# Altium PCB PCB1.PcbDoc
Units mm, origin at the board's own origin, x right, y up, seen from the top; angles counter-clockwise.
Board outline 44 x 20 mm, 2 copper layers (Top Layer, Bottom Layer), stack 1.57 mm thick; 8 components, 3 nets, 17 pads, 4 vias.
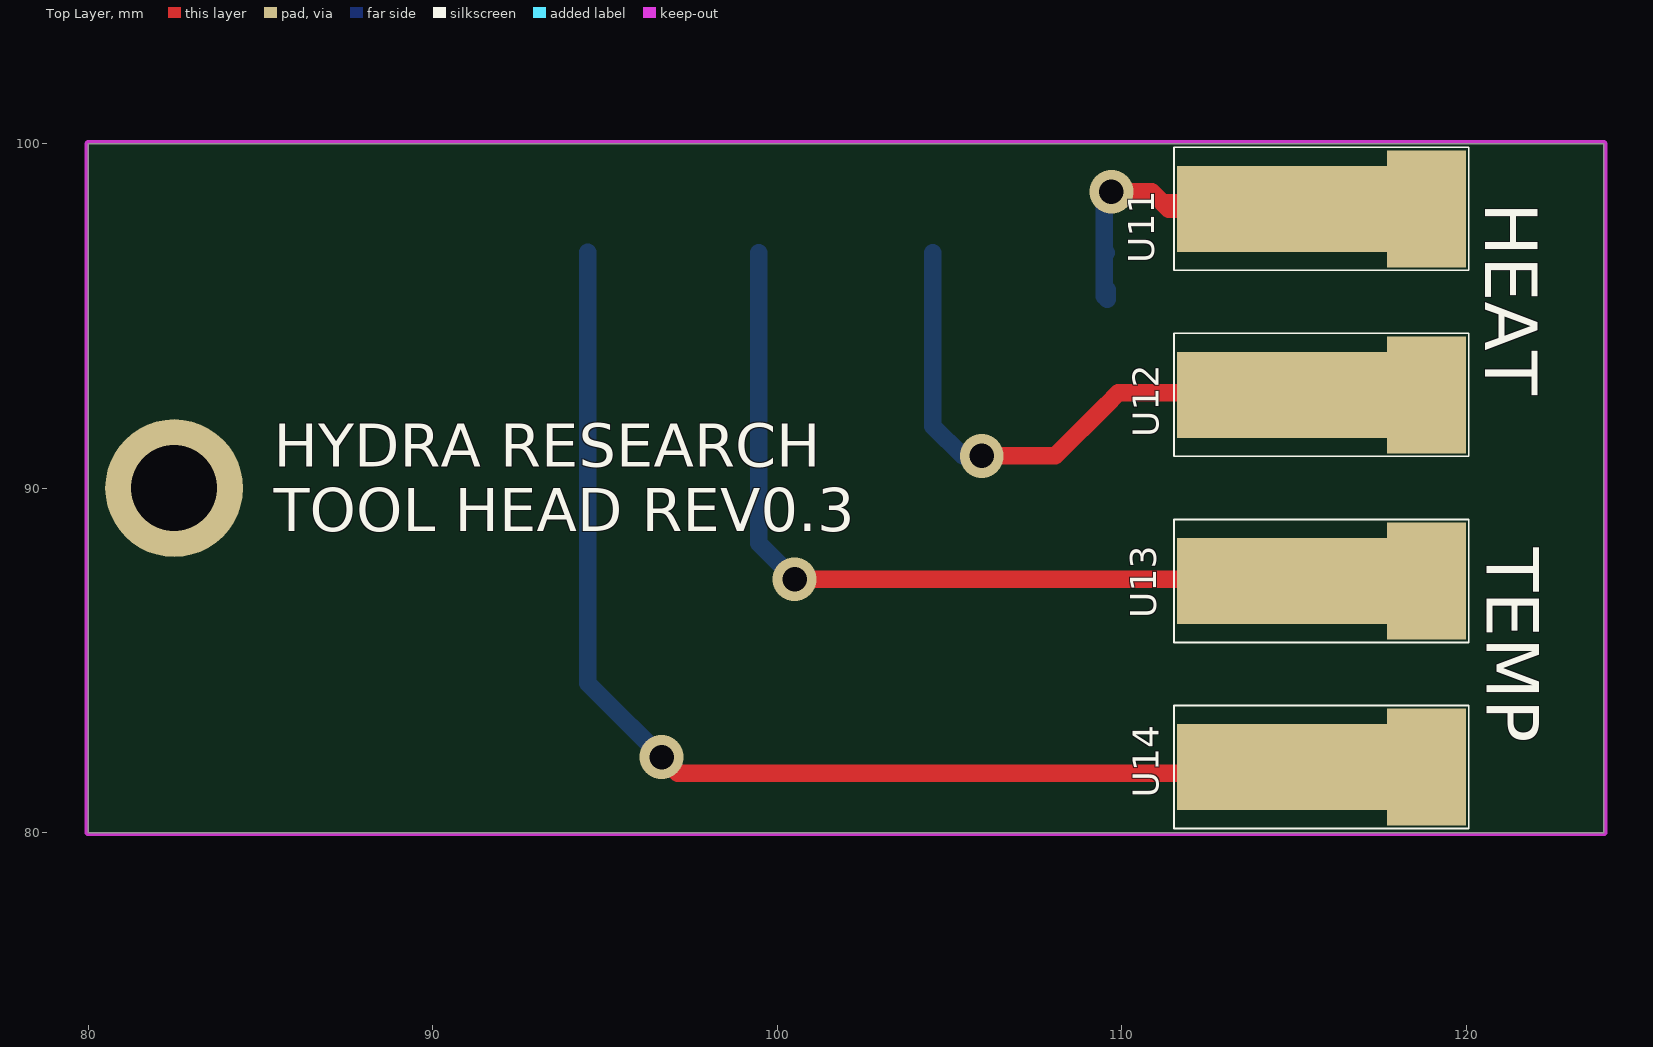
[diagram p0: Top Layer view]
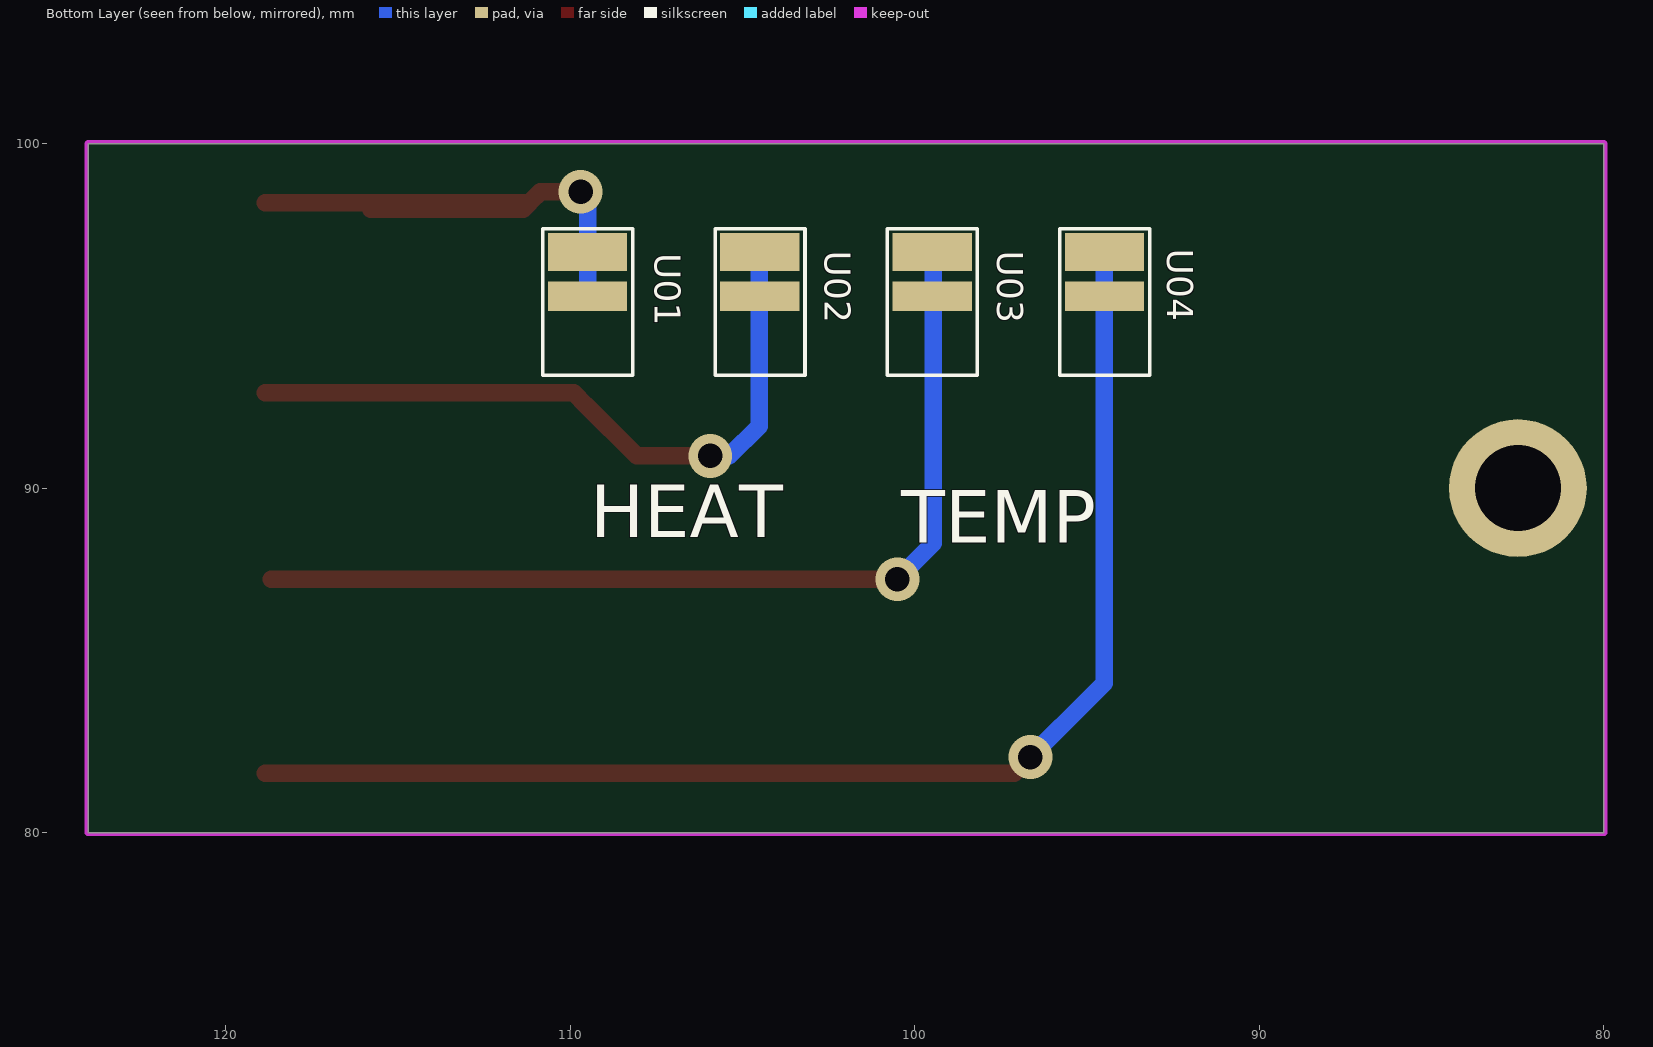
[diagram p1: Bottom Layer view, seen from below]

## Layer stack, top to bottom
Top Solder: solder mask 0.01, Solder Resist, Dk 3.5
Top Layer: signal copper 0.035
Dielectric 1: dielectric 1.5, FR-4, Dk 4.8
Bottom Layer: signal copper 0.035
Bottom Solder: solder mask 0.01, Solder Resist, Dk 3.5

## Board outline
80,80 80,100 124,100 124,80

## Design rules (kind name [scope] priority, off if disabled: settings)
Clearance [All] p1: gap=0.254 ignorepadtopadclearanceinfootprint=FALSE except(0: Arc-Hole Track-Hole SMDPad-Hole THPad-Hole Via-Hole Fill-Hole Poly-Hole Region-Hole Text-Hole; 0.01: Arc-Arc Arc-Track Arc-SMDPad Arc-THPad Track-Track Track-SMDPad Track-THPad SMDPad-SMDPad SMDPad-THPad THPad-THPad)
ComponentClearance [All] p1: gap=0.25 collisioncheckmode=3 verticalgap=0 showdistances=FALSE
MinimumSolderMaskSliver [All] p1: minsoldermaskwidth=0.025
PolygonConnect [All] p1: connectstyle=Relief reliefconductorwidth=0.254 reliefentries=4 polygonreliefangle="90 Angle" airgapwidth=0.254
RoomDefinition REV0.4 [InComponentClass('REV0.4')] p1: confinementstyle=ConfineIn formatcopy=TRUE lockcomponents=FALSE outline 73.673,75.184 134.252,75.184 134.252,108.47 73.673,108.47
RoutingVias [All] p1: holewidth=0.711 width=1.27 viastyle="Through Hole" minholewidth=0.711 minwidth=1.27 maxholewidth=0.711 maxwidth=1.27
ShortCircuit [InPadClass('All Pads') vs InPadClass('All Pads')] p1: allowed=TRUE
SolderMaskExpansion [All] p1: expansion=0.102
Width [All] p1: maxlimit=0.762 minlimit=0.254 preferedwidth=0.508
27 further rules are at their usual default settings.

## Components (designator, comment, footprint, x,y, rotation, side; value= is the part's Value field where it differs from the comment)
U01 "A125081CT" A125081CT-ND 110.5,97.27 r180 bottom
U02 "A125081CT" A125081CT-ND 105.5,97.27 r180 bottom
U03 "A125081CT" A125081CT-ND 100.5,97.27 r180 bottom
U04 "A125081CT" A125081CT-ND 95.5,97.27 r180 bottom
U11 "WM17990CT" WM17990CT-ND-L 123.631,95.6 r90 top
U12 "WM17990CT" WM17990CT-ND-L 123.631,90.2 r90 top
U13 "WM17990CT" WM17990CT-ND-L 123.631,84.8 r90 top
U14 "WM17990CT" WM17990CT-ND-L 123.631,79.4 r90 top

## Footprints (in the part's own frame and the unit in brackets; to place one, negate y for a bottom-side part, rotate by r counter-clockwise, add the part's x,y. Pads: shape width x height; smd on the part's side, far side on the other; paste and mask are expansions set on the pad)
A125081CT-ND [mm]
  rect 2.3x0.85 smd: 1(1,-1.7)
  rect 2.3x1.1 smd: 1(1,-0.42)
  silkscreen extent -0.3,-3.99 2.31,0.25, body extent 0.15,-3.96 1.85,0.04, height 2.29
WM17990CT-ND-L [mm]
  rect 3.4x2.3 smd mask+0.1: 1(2.5,4.78)
  rect 2.5x8.4 smd mask+0.1: 1(2.5,7.831)
  Top Layer region: 0.317,9.449
  Top Layer region: -3.81,6.731
  silkscreen extent 0.72,3.56 4.29,12.11, body extent 1,4.05 4,12.05, height 2.9

## Free pads (board coordinates)
  round 4 hole 2.5 paste+0: 2(82.5,90)

## Via types
v1: diameter 1.27, hole 0.711, Top Layer to Bottom Layer, 4 vias

## Nets (pads, with @x,y where several pads share a name; then routed paths per layer and width w, separated by ;. In a path a pad name is that pad's centre, name@x,y a point inside that pad or via, vN(x,y) a via of type N, cw(c..) or ccw(c..) an arc to the next point about the centre after c; other vN are vias at no path point)
NetU01_?: 
NetU03_?: 
NetU04_?: 
pads on no net: U01.1 U02.1 U03.1 U04.1 U11.1 U12.1 U13.1 U14.1
copper on no net: | length 107
  Top Layer w0.254: v1(96.647,82.194) v1@96.698,82.144 ; v1(100.508,87.351) v1@100.584,87.351
  Top Layer w0.508: v1(96.647,82.194) 97.121,81.72 118.851,81.72 ; v1@100.584,87.351 118.676,87.351 ; v1(105.943,90.932) 108.077,90.932 109.576,92.431 ; 109.54,92.395 109.905,92.76 118.851,92.76 ; v1(109.703,98.603) 110.867,98.603 111.19,98.28 118.851,98.28 ; 110.96,98.51 111.37,98.1 115.8,98.1
  Bottom Layer w0.254: 94.485,95.432 94.485,95.519 ; 99.466,95.555 99.466,95.642 99.466,95.85 ; 99.47,96.835 99.47,96.364 99.466,96.361 ; 99.466,95.85 99.47,95.853 99.466,95.85 ; 99.466,96.361 99.466,96.876 99.466,96.361
  Bottom Layer w0.508: 94.5,84.341 94.5,95.57 94.5,96.85 ; 94.52,84.321 94.81,84.031 v1(96.647,82.194) ; 99.466,95.85 99.466,94.749 99.466,88.392 v1(100.508,87.351) ; 99.47,95.853 99.47,96.835 ; 104.521,94.622 104.521,91.796 105.385,90.932 v1(105.943,90.932) ; 104.524,94.625 104.524,96.835 104.524,96.491 ; 109.5,95.57 109.5,98.4 v1(109.703,98.603) v1@109.553,98.454 ; 109.55,95.555 109.55,95.773 109.553,95.777 109.576,95.755 109.576,95.479 ; 109.55,96.832 109.553,96.835

## Keep-outs
Keep-Out Layer:
  lines w0.1: 79.95,80 ccw(c80,80) 80,79.95 ; 79.95,80 ccw(c80,80) 80,79.95 ; 79.95,80 79.95,100 ; 79.95,100 cw(c80,100) 80,100.05 ; 79.95,100 cw(c80,100) 80,100.05 ; 80,79.95 124,79.95 ; 80,100.05 124,100.05 ; 124,79.95 ccw(c124,80) 124.05,80 ; 124,79.95 ccw(c124,80) 124.05,80 ; 124,100.05 cw(c124,100) 124.05,100 ; 124,100.05 cw(c124,100) 124.05,100 ; 124.05,80 124.05,100

## Silkscreen, mask and mechanical layers (free items; w line width, h text height)
Top Overlay:
  text "HEAT" at 120.548,98.298 h1.52 r270
  text "HYDRA RESEARCH / TOOL HEAD REV0.3" at 85.395,88.748 h1.25
  text "TEMP" at 120.599,88.265 h1.52 r270
Bottom Overlay:
  text "HEAT" at 109.42,88.57 h1.52
  text "TEMP" at 100.39,88.41 h1.52
Drill Drawing:
  drawing of 213 lines, arcs and shapes, not listed
  text "Symbol" at 82.047,124.354 h1.83
  text "Count" at 94.896,124.354 h1.83
  text "Hole Size" at 107.085,124.354 h1.83
  text "Plated" at 135.017,124.354 h1.83
  text "Hole Type" at 147.866,124.354 h1.83
  text "Drill Layer Pair" at 166.504,124.354 h1.83
  text "Via/Pad" at 204.593,124.354 h1.83
  text "Pad Shape" at 219.575,124.354 h1.83
  text "Template" at 238.518,124.354 h1.83
  text "Description" at 259.087,124.354 h1.83
  text "Hole Tolerance (+)" at 280.772,124.354 h1.83
  text "Hole Tolerance (-)" at 314.646,124.354 h1.83
  text "1" at 94.896,120.544 h1.52
  text "98.43mil (2.500mm)" at 107.085,120.544 h1.52
  text "PTH" at 135.017,120.544 h1.52
  text "Round" at 147.866,120.544 h1.52
  text "Top Layer - Bottom Layer" at 166.504,120.544 h1.52
  text "Pad" at 204.593,120.544 h1.52
  text "Rounded" at 219.575,120.544 h1.52
  text "c400h250p400" at 238.518,120.544 h1.52
  text "4" at 94.896,116.734 h1.52
  text "28.00mil (0.711mm)" at 107.085,116.734 h1.52
  text "PTH" at 135.017,116.734 h1.52
  text "Round" at 147.866,116.734 h1.52
  text "Top Layer - Bottom Layer" at 166.504,116.734 h1.52
  text "Via" at 204.593,116.734 h1.52
  text "Rounded" at 219.575,116.734 h1.52
  text "v127h71" at 238.518,116.734 h1.52
  text "5 Total" at 94.896,112.924 h1.52
  text "Layer" at 143.055,97.231 h1.52
  text "Name" at 153.467,97.231 h1.52
  text "Material" at 177.082,97.231 h1.52
  text "Thickness" at 198.92,97.231 h1.52
  text "Constant" at 215.426,97.231 h1.52
  text "Board Layer Stack" at 229.901,97.231 h1.52
  text "1" at 143.055,94.183 h1.52
  text "Top Overlay" at 153.467,94.183 h1.52
  text "2" at 143.055,91.135 h1.52
  text "Top Solder" at 153.467,91.135 h1.52
  text "Solder Resist" at 177.082,91.135 h1.52
  text "0.39mil" at 198.92,91.135 h1.52
  text "3.5" at 215.426,91.135 h1.52
  text "3" at 143.055,88.087 h1.52
  text "Top Layer" at 153.467,88.087 h1.52
  text "Copper" at 177.082,88.087 h1.52
  text "1.38mil" at 198.92,88.087 h1.52
  text "4" at 143.055,85.039 h1.52
  text "Dielectric 1" at 153.467,85.039 h1.52
  text "FR-4" at 177.082,85.039 h1.52
  text "59.06mil" at 198.92,85.039 h1.52
  text "4.8" at 215.426,85.039 h1.52
  text "5" at 143.055,81.991 h1.52
  text "Bottom Layer" at 153.467,81.991 h1.52
  text "Copper" at 177.082,81.991 h1.52
  text "1.38mil" at 198.92,81.991 h1.52
  text "6" at 143.055,78.943 h1.52
  text "Bottom Solder" at 153.467,78.943 h1.52
  text "Solder Resist" at 177.082,78.943 h1.52
  text "0.39mil" at 198.92,78.943 h1.52
  text "3.5" at 215.426,78.943 h1.52
  text "7" at 143.055,75.895 h1.52
  text "Bottom Overlay" at 153.467,75.895 h1.52

## Dimensions
115.8,81.9 to 124,80 on Drill Drawing
105.66,95.42 to 108.34,95.53 on Drill Drawing
94.5,95.57 to 99.5,95.57 on Drill Drawing
93.35,97.63 to 110.65,99.62 on Drill Drawing
124,80 to 120.01,82.29 on Drill Drawing
80,80.2 to 124,80.2 on Drill Drawing
124.05,100 to 124.05,80 on Drill Drawing
82.5,90 to 79.95,80 on Drill Drawing
93.365,97.504 to 79.95,100 on Drill Drawing
124,100.05 to 110.649,97.499 on Drill Drawing
80,100.54 to 93.345,97.484 on Drill Drawing
82.5,90 to 80,80 on Drill Drawing